# EAGLE board PCB01_schematic (EAGLE 9.6.2)
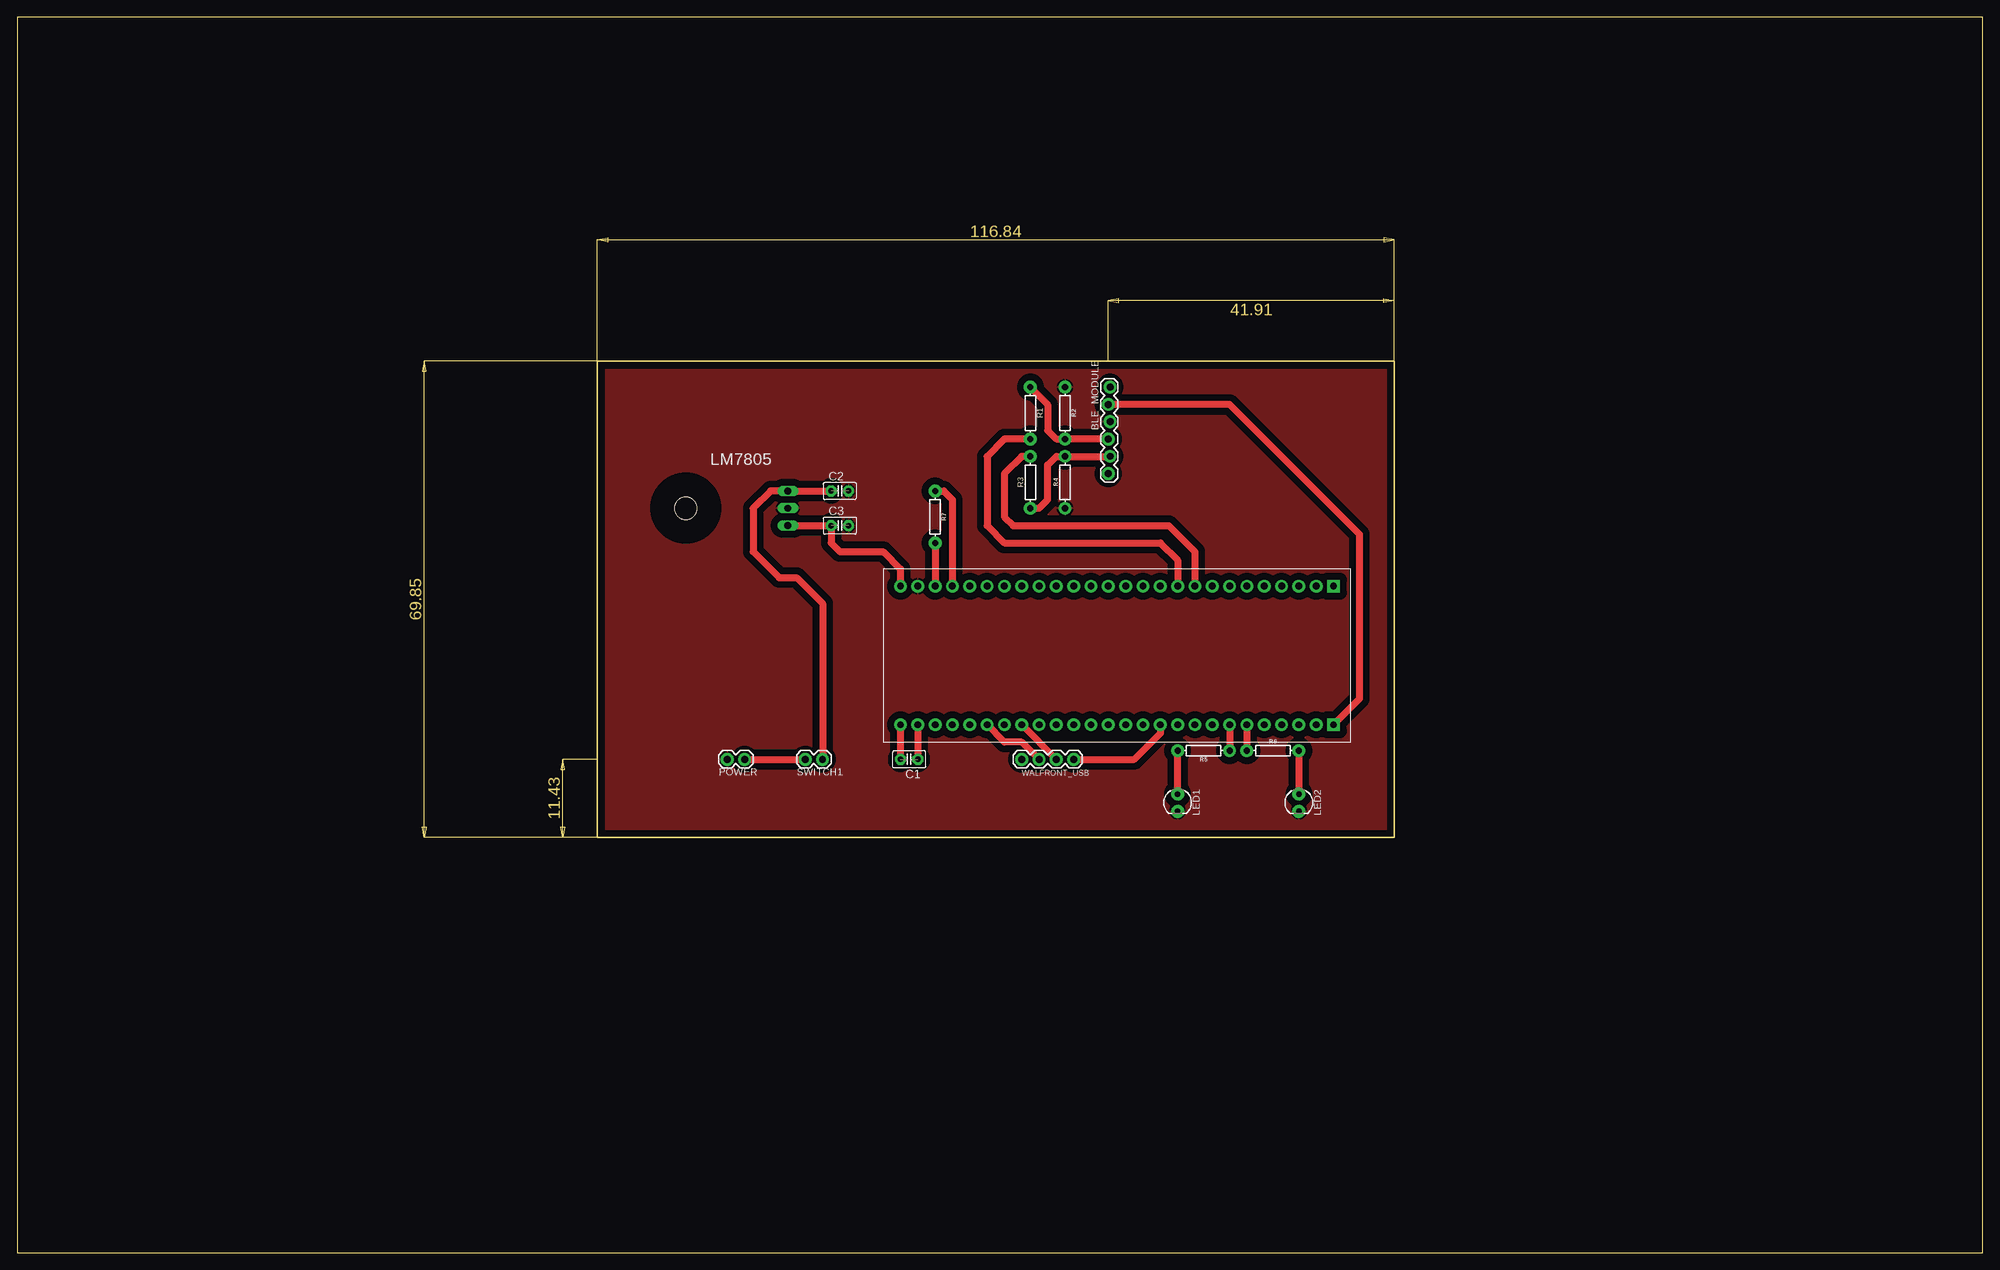
[diagram p0: board, top side]
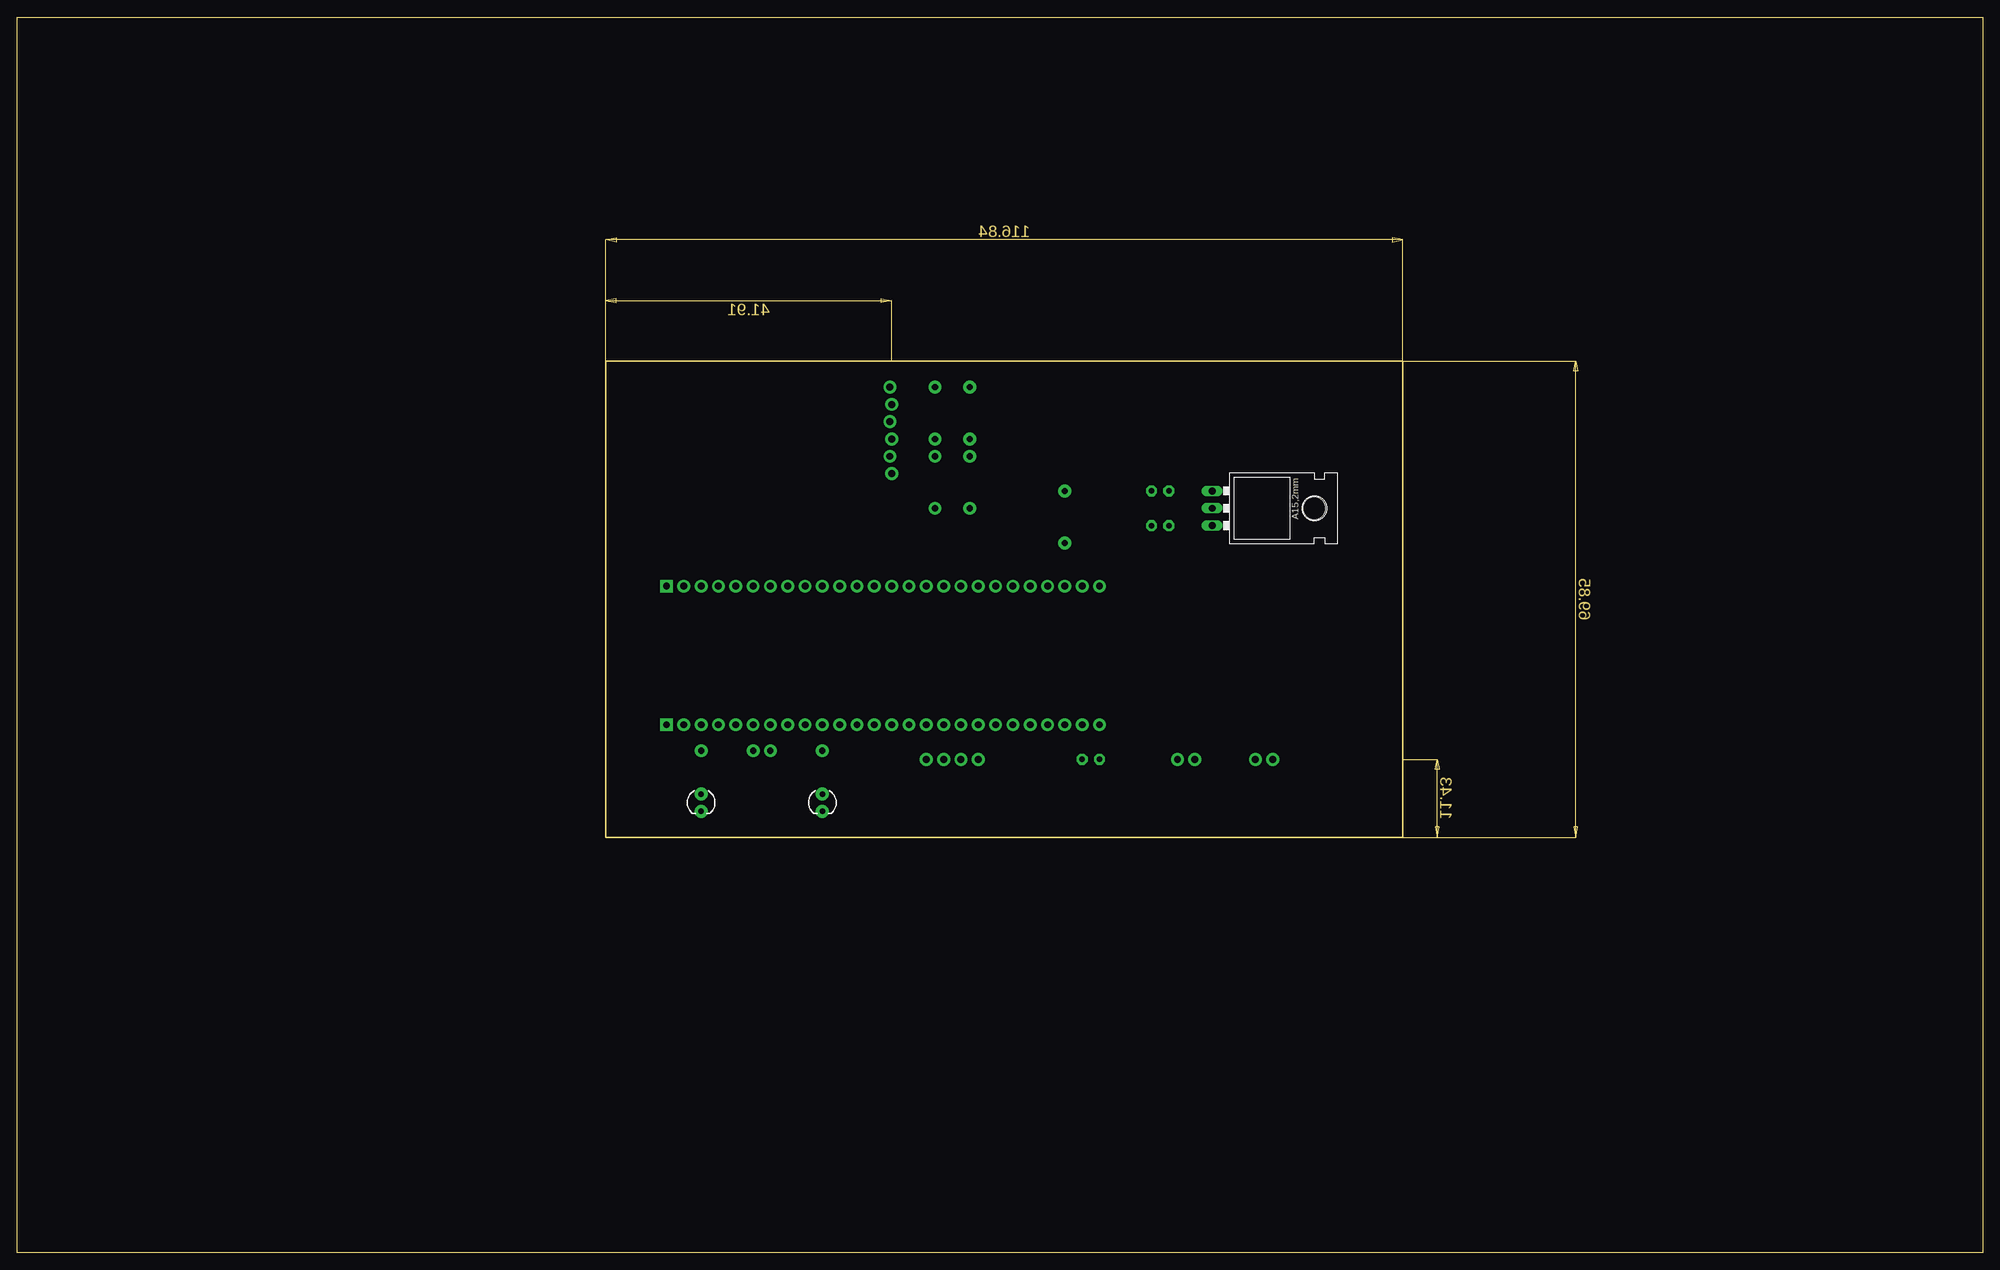
[diagram p1: board, bottom side, seen from below]

Size 288.27 x 181.28 mm. Coordinates in mm from the lower left corner, seen from the top.
Outline: 0,0 288.27,0 288.27,181.28 0,181.28 0,0
Outline: 85.09,130.81 201.93,130.81 201.93,60.96 85.09,60.96 85.09,130.81
Copper layers (1*16): Top 0.035mm / dielectric 1.5mm / Bottom 0.035mm
Design rules "default": minimum track width 6mil, minimum drill 0.35mm, track to track 6mil, track to pad 6mil, pad to pad 6mil, via to via 6mil, smd to smd 6mil, copper to edge 40mil, drill to drill 6mil, minimum pad ring 10mil, minimum via ring 8mil, stop-mask expansion 4mil, vias tented up to drill 0mil, thermal gap 10mil

## Footprints (pad centres in the part's own frame; a part is rotated, then mirrored left to right if it is on the bottom)
1X06_LOCK = drill 1.016 pad 1.88: 1 0,0; 2 2.54,-0.254; 3 5.08,0; 4 7.62,-0.254; 5 10.16,0; 6 12.7,-0.254
C2.5-2 = drill 0.813 pad 1.6 octagon: 1 -1.27,0; 2 1.27,0
LED_3MM = drill 0.813 pad 1.88: A -1.27,0; K 1.27,0
78XXL = drill 1.016 long: GND 0,-3.81; IN -2.54,-3.81; OUT 2.54,-3.81 | hole 3.302: 0,11.176
1X02 = drill 1.016 pad 1.88: 1 0,0; 2 2.54,0
AXIAL-0.3 = drill 0.9 pad 1.88: P$1 -3.81,0; P$2 3.81,0
CY8CKIT-059_TARGET_3 = drill 1.016 pad 1.876 square: 1 30.48,8.89; 27 30.48,-11.43 | drill 1.016 pad 1.876: 2 27.94,8.89; 3 25.4,8.89; 4 22.86,8.89; 5 20.32,8.89; 6 17.78,8.89; 7 15.24,8.89; 8 12.7,8.89; 9 10.16,8.89; 10 7.62,8.89; 11 5.08,8.89; 12 2.54,8.89; 13 0,8.89; 14 -2.54,8.89; 15 -5.08,8.89; 16 -7.62,8.89; 17 -10.16,8.89; 18 -12.7,8.89; 19 -15.24,8.89; 20 -17.78,8.89; 21 -20.32,8.89; 22 -22.86,8.89; 23 -25.4,8.89; 24 -27.94,8.89; 25 -30.48,8.89; 26 -33.02,8.89; 28 27.94,-11.43; 29 25.4,-11.43; 30 22.86,-11.43; 31 20.32,-11.43; 32 17.78,-11.43; 33 15.24,-11.43; 34 12.7,-11.43; 35 10.16,-11.43; 36 7.62,-11.43; 37 5.08,-11.43; 38 2.54,-11.43; 39 0,-11.43; 40 -2.54,-11.43; 41 -5.08,-11.43; 42 -7.62,-11.43; 43 -10.16,-11.43; 44 -12.7,-11.43; 45 -15.24,-11.43; 46 -17.78,-11.43; 47 -20.32,-11.43; 48 -22.86,-11.43; 49 -25.4,-11.43; 50 -27.94,-11.43; 51 -30.48,-11.43; 52 -33.02,-11.43
1X04 = drill 1.016 pad 1.88: 1 0,0; 2 2.54,0; 3 5.08,0; 4 7.62,0

## Placement (x,y rotation side)
BLE_MODULE  [1X06_LOCK]  160.02,114.3 90 top
C1  0.1uF  [C2.5-2]  130.81,72.39 180 top
C2  0.33uF  [C2.5-2]  120.65,111.76 0 top
C3  0.1uF  [C2.5-2]  120.65,106.68 0 top
LED1  [LED_3MM]  170.18,66.04 270 top
LED2  [LED_3MM]  187.96,66.04 270 top
LM7805  [78XXL]  109.22,109.22 270 bottom
POWER  [1X02]  104.14,72.39 0 top
R1  1k  [AXIAL-0.3]  148.59,123.19 270 top
R2  2k  [AXIAL-0.3]  153.67,123.19 270 top
R3  1k  [AXIAL-0.3]  148.59,113.03 90 top
R4  2k  [AXIAL-0.3]  153.67,113.03 90 top
R5  100  [AXIAL-0.3]  173.99,73.66 180 top
R6  100  [AXIAL-0.3]  184.15,73.66 0 top
R7  1k  [AXIAL-0.3]  134.62,107.95 270 top
SWITCH1  [1X02]  115.57,72.39 0 top
U$2  CY8CKIT-059_TARGET_3  [CY8CKIT-059_TARGET_3]  162.56,88.9 0 top
WALFRONT_USB  [1X04]  147.32,72.39 0 top

## Library data of the parts
BLE_MODULE POWER SWITCH1 = SparkFun-Connectors
C1-C3 = capacitor-wima
LED1 LED2 = SparkFun-LED; PROD_ID: DIO-08794
LM7805 = SparkFun-IC-Power
R1 R3 = SparkFun-Resistors; PROD_ID: RES-12183
R2 R4 = SparkFun-Resistors
R5 R6 = SparkFun-Resistors; PROD_ID: RES-12181
R7 = SparkFun-Resistors; PROD_ID: RES-08380
U$2 = CYKIT
WALFRONT_USB = SparkFun-Connectors; PROD_ID: CONN-09696

## Nets
CE: U$2.45 WALFRONT_USB.3
EN_BT: BLE_MODULE.6
GND: BLE_MODULE.4 C2.2 C3.2 LED1.K LED2.K LM7805.GND POWER.1 R2.P$1 R4.P$1 U$2.25
GND1: U$2.28
GND2: C1.2 U$2.52
N$1: C2.1 LM7805.IN SWITCH1.2
N$2: POWER.2 SWITCH1.1
N$6: LED1.A R5.P$2
N$7: LED2.A R6.P$2
P_0.4: R5.P$1 U$2.33
P_0.5: R6.P$1 U$2.32
P_3.0: C1.1 U$2.51
P_12.2: U$2.14
P_12.3: U$2.13
RE: U$2.47 WALFRONT_USB.2
RX_BT: BLE_MODULE.2 R3.P$1 R4.P$2
STATE_BT: BLE_MODULE.1
TIA_END_PIN: R7.P$1 U$2.23
TIA_RESISTOR_1: R7.P$2 U$2.24
TX_BT: BLE_MODULE.3 R1.P$1 R2.P$2
UART_RX: R1.P$2 U$2.10
UART_TX: R3.P$2 U$2.9
VDD: BLE_MODULE.5 U$2.27
VDD_IO: C3.1 LM7805.OUT U$2.26
WE: U$2.37 WALFRONT_USB.4

## Tracks (layer width: path | path; a pad name or v marks a point on that pad's centre or on a via)
CE
  Top 1: U$2.45 WALFRONT_USB.3
GND
  pour Top (isolate 1.016): 85.09,60.96 85.09,130.81 201.93,130.81 201.93,60.96
GND2
  Top 1: U$2.52 C1.2
N$1
  Top 1: C2.1 LM7805.IN 110.49,111.76 107.95,109.22 107.95,102.87 111.76,99.06 114.3,99.06 118.11,95.25 SWITCH1.2
N$2
  Top 1: POWER.2 SWITCH1.1
N$6
  Top 1: LED1.A R5.P$2
N$7
  Top 1: R6.P$2 LED2.A
P_0.4
  Top 1: U$2.33 R5.P$1
P_0.5
  Top 1: U$2.32 R6.P$1
P_3.0
  Top 1: U$2.51 C1.1
RE
  Top 1: WALFRONT_USB.2 147.32,74.93 144.78,74.93 U$2.47
RX_BT
  Top 1: R3.P$1 149.86,109.22 151.13,110.49 151.13,115.57 152.4,116.84 R4.P$2 BLE_MODULE.2
TIA_END_PIN
  Top 1: R7.P$1 135.89,111.76 137.16,110.49 U$2.23
TIA_RESISTOR_1
  Top 1: R7.P$2 U$2.24
TX_BT
  Top 1: BLE_MODULE.3 R2.P$2 152.4,119.38 151.13,120.65 151.13,124.46 R1.P$1
UART_RX
  Top 1: R1.P$2 144.78,119.38 142.24,116.84 142.24,106.68 144.78,104.14 167.64,104.14 170.18,101.6 U$2.10
UART_TX
  Top 1: R3.P$2 147.32,116.84 144.78,114.3 144.78,107.95 146.05,106.68 168.91,106.68 172.72,102.87 U$2.9
VDD
  Top 1: BLE_MODULE.5 177.8,124.46 196.85,105.41 196.85,81.28 U$2.27
VDD_IO
  Top 1: LM7805.OUT C3.1 119.38,104.14 120.65,102.87 127,102.87 129.54,100.33 U$2.26
WE
  Top 1: WALFRONT_USB.4 163.83,72.39 167.64,76.2 U$2.37